# Altium PCB PCB_BTL_2.PcbDoc
Units mm, origin at the board's own origin, x right, y up, seen from the top; angles counter-clockwise.
Board outline 124.59 x 101.6 mm, 2 copper layers (Top Layer, Bottom Layer); 41 components, 38 nets, 137 pads, 5 vias.
Unrouted connection lines stored in the file: 3.
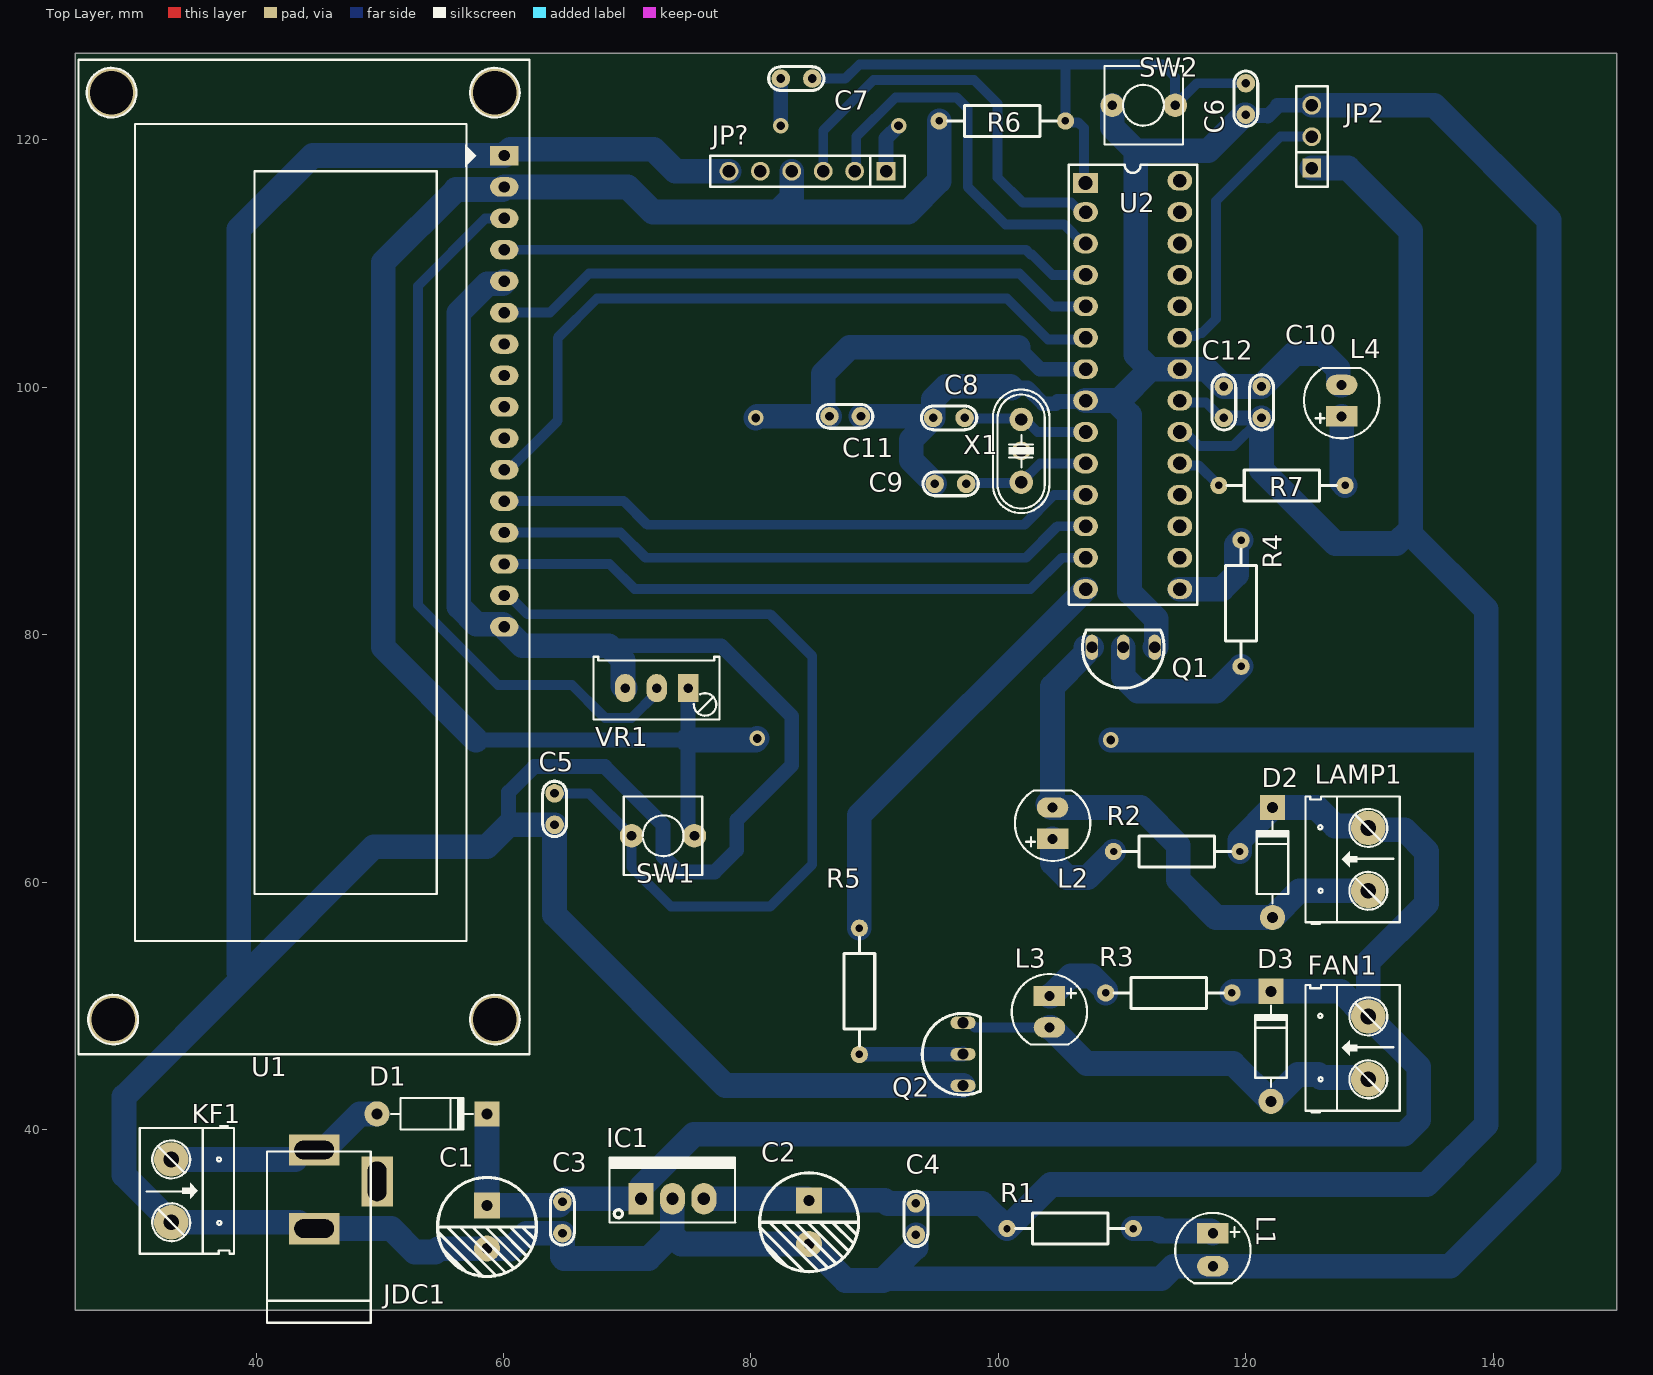
[diagram p0: Top Layer view]
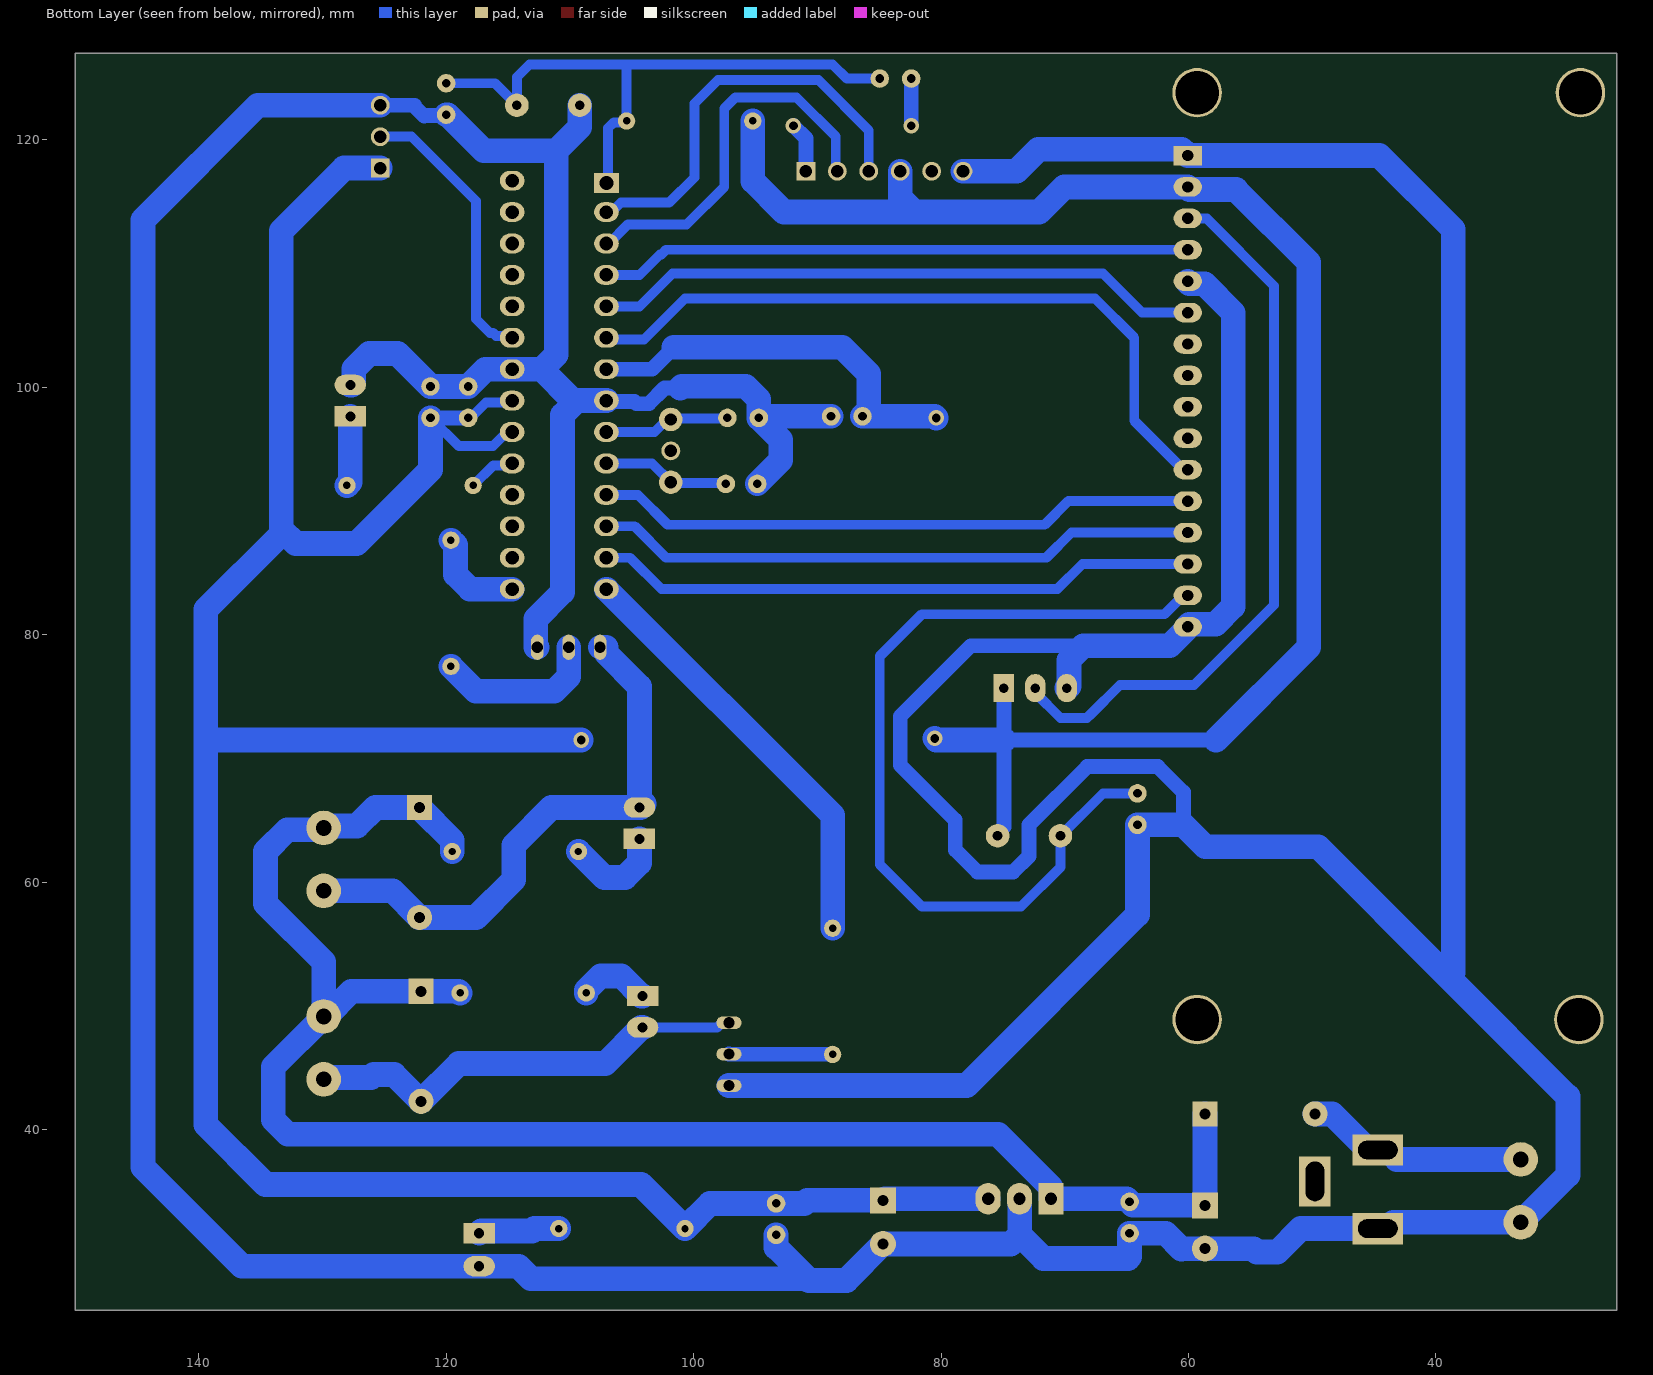
[diagram p1: Bottom Layer view, seen from below]
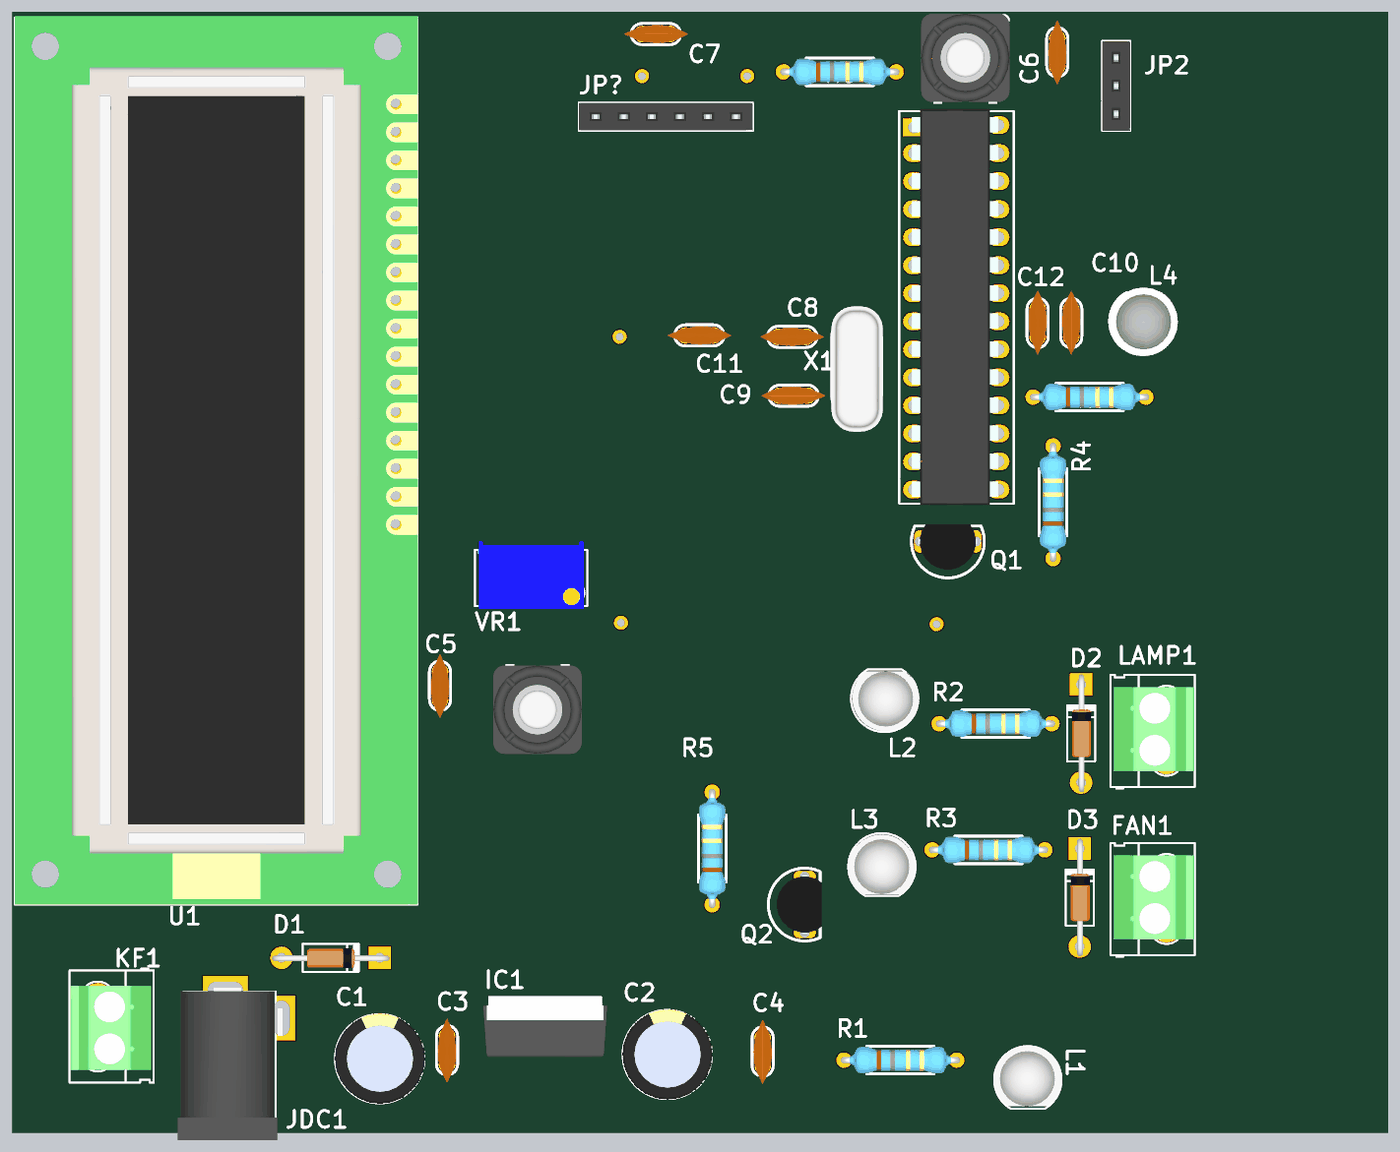
[diagram p2: 3D render of the assembled board from above, using the file's embedded part models]

## Layer stack, top to bottom
Top Solder: solder mask 0.0102, Solder Resist, Dk 3.5
Top Layer: signal copper 0.0356
Dielectric 1: dielectric 0.32, FR-4, Dk 4.8
Bottom Layer: signal copper 0.0356
Bottom Solder: solder mask 0.0102, Solder Resist, Dk 3.5

## Board outline
25.4,25.4 149.987,25.4 149.987,127 25.4,127

## Design rules (kind name [scope] priority, off if disabled: settings)
Clearance [All] p1: gap=0.254 ignorepadtopadclearanceinfootprint=FALSE
PolygonConnect [All] p1: connectstyle=Relief reliefconductorwidth=0.254 reliefentries=4 polygonreliefangle="90 Angle" airgapwidth=0.254
RoutingVias [All] p1: holewidth=0.711 width=0.889 viastyle="Through Hole" minholewidth=0.711 minwidth=0.889 maxholewidth=0.711 maxwidth=0.889
SolderMaskExpansion [All] p1: expansion=0.102 istentingtop=FALSE
Width AREF [All] p1: maxlimit=2 minlimit=0.8 preferedwidth=1.2
Width gnd [All] p2: maxlimit=2 minlimit=0.8 preferedwidth=1.2
Width 9V [All] p3: maxlimit=2 minlimit=0.8 preferedwidth=1.2
Width [All] p4: maxlimit=0.8 minlimit=0.4 preferedwidth=0.5
30 further rules are at their usual default settings.

## Components (designator, comment, footprint, x,y, rotation, side; value= is the part's Value field where it differs from the comment)
C1 "1000uF" "tu hoa 8mm" 58.674,32.131 r270 top
C2 "1000uF" "tu hoa 8mm" 84.709,32.512 r270 top
C3 "104" "tu gom" 64.77,32.893 r270 top
C4 "104" "tu gom" 93.345,32.766 r270 top
C5 "104" "tu gom" 64.135,65.913 r270 top
C6 "104" "tu gom" 120.015,123.317 r270 top
C7 "104" "tu gom" 83.693,124.968 r0 top
C8 "22pF" "tu gom" 96.012,97.536 r180 top
C9 "22pF" "tu gom" 96.139,92.202 r180 top
C10 "104" "tu gom" 121.285,98.806 r90 top
C11 "104" "tu gom" 87.63,97.663 r0 top
C12 "104" "tu gom" 118.237,98.806 r90 top
D1 "1N4007" D1A 49.784,41.275 r180 top
D2 "1N4007" D1A 122.174,57.15 r270 top
D3 "1N4007" D1A 122.047,42.291 r270 top
FAN1 "DC MOTOR" "Con 2 KF301 5.08" 129.921,44.069 r90 top
IC1 "LM7805" QTO-220 71.12,34.417 r0 top
JDC1 "Jac DC" DC-IN 47.244,35.179 r90 top
JP2 "JP Sensor" "JP 1x3 CT" 125.349,117.729 r90 top
JP? "JP 1x6 2.54" "JP 1x6 CT" 90.932,117.475 r180 top
KF1 "CON 2 KF301" "Con 2 KF301 5.08" 33.147,37.592 r270 top
L1 "LED 5mm" LED-5MM-Green 117.348,31.496 r270 top
L2 "LED 5mm" LED-5MM-Yellow 104.394,63.5 r90 top
L3 "LED 5mm" LED-5MM-RED 104.14,50.8 r270 top
L4 "LED 5mm" LED-5MM-WHITE 127.762,98.933 r90 top
LAMP1 "DC LAMP" "Con 2 KF301 5.08" 129.921,59.309 r90 top
Q1 "?" TO92 110.109,78.994 r90 top value=C9014
Q2 "?" TO92 97.155,46.101 r0 top value=C9014
R1 "1k" "tro vach 1/4w" 105.811,32.004 r180 top
R2 "2k" "tro vach 1/4w" 114.427,62.484 r180 top
R3 "2k" "tro vach 1/4w" 113.792,51.054 r180 top
R4 "1k" "tro vach 1/4w" 119.634,82.55 r270 top
R5 "1k" "tro vach 1/4w" 88.773,51.181 r270 top
R6 "10k" "tro vach 1/4w" 100.33,121.539 r180 top
R7 "1k" "tro vach 1/4w" 122.936,92.075 r180 top
SW1 "SW" SW2 75.438,63.754 r180 top value="SW chip 2 pin"
SW2 "SW" SW2 109.22,122.809 r0 top value="SW chip 2 pin"
U1 "LCD" LCD16X2 60.071,118.745 r270 top value=LCD16x2
U2 "ATMEGA328P-PU" 27_DIP_7.62mm 107.051,116.523 r0 top
VR1 "10K" VR1 74.93,75.692 r180 top value="VR 10K"
X1 "16Mhz" XT2 101.854,94.869 r90 top value=4Mhz

## Footprints (in the part's own frame and the unit in brackets; to place one, negate y for a bottom-side part, rotate by r counter-clockwise, add the part's x,y. Pads: shape width x height; smd on the part's side, far side on the other; paste and mask are expansions set on the pad)
27_DIP_7.62mm [mm]
  rect 2x1.6 hole 1.1: 1(0,0)
  oval 2x1.6 hole 1.1: 2(0.01,-2.35) 3(0.01,-4.89) 4(0.01,-7.43) 5(0.01,-9.97) 6(0.01,-12.51) 7(0.01,-15.05) 8(0.01,-17.59) 9(0.01,-20.13) 10(0.01,-22.67) 11(0.01,-25.21) 12(0.01,-27.75) 13(0.01,-30.29) 14(0.01,-32.83) 15(7.63,-32.83) 16(7.63,-30.29) 17(7.63,-27.75) 18(7.63,-25.21) 19(7.63,-22.67) 20(7.63,-20.13) 21(7.63,-17.59) 22(7.63,-15.05) 23(7.63,-12.51) 24(7.63,-9.97) 25(7.63,-7.43) 26(7.63,-4.89) 27(7.63,-2.35) 28(7.63,0.19)
  silkscreen extent -1.35,-34.1 9.02,1.46, body extent -0.23,-34.26 7.65,1.68, height 4.65
"Con 2 KF301 5.08" [mil]
  round 110 hole 50: 1(0,0) 2(200,0)
  silkscreen extent -106,-100 300,200, body extent -45,-97 255,190, height 335
D1A [mil] "Diode 1A, W 100mil, L 350mil"
  round 80 hole 35: 1(0,0)
  rect 80x80 hole 35: 2(-350,0)
  silkscreen extent -305,-50 -45,50, body extent -386,-33 34,36, height 84
DC-IN [mm] "Jac DC input"
  rect 2.54x4.064 hole 1.5 slot 3.2 at 90 deg: 1(3.175,2.54) 2(-3.175,2.54)
  rect 4.064x2.54 hole 1.5 slot 3.2 at 0 deg: 3(0.635,-2.54)
  silkscreen extent -10.79,-2.03 3.05,6.35, body extent -10.42,-2.67 3.4,6.84, height 11.02
"JP 1x3 CT" [mm]
  rect 1.52x1.52 hole 1.02: 1(0,0)
  round 1.52 hole 1.02: 2(2.54,0) 3(5.08,0)
  silkscreen extent -1.52,-1.27 6.6,1.27, body extent -1.52,-1.25 6.6,1.25, height 8.51
"JP 1x6 CT" [mm] "6 row, straight, gold plating"
  rect 1.52x1.52 hole 1.02: 1(0,0)
  round 1.52 hole 1.02: 2(2.54,0) 3(5.08,0) 4(7.62,0) 5(10.16,0) 6(12.7,0)
  silkscreen extent -1.52,-1.27 14.22,1.27, body extent -1.52,-1.25 14.22,1.25, height 8.51
LCD16X2 [mil] "LCD dipslay 16x2, 16 pin"
  rect 62x90 hole 36: 1(0,0)
  oval 62x90 hole 36: 2(100,0) 3(200,0) 4(300,0) 5(400,0) 6(500,0) 7(600,0) 8(700,0) 9(800,0) 10(900,0) 11(1000,0) 12(1100,0) 13(1200,0) 14(1300,0) 15(1400,0) 16(1500,0)
  round 157.48 hole 137.8: "Hole 0"(-200,-30) "Hole 0"(-200,-1250) "Hole 0"(2750,-30) "Hole 0"(2750,-1245)
  silkscreen extent -305,-1355 2860,80, body extent -309,-1355 2860,82, height 414
LED-5MM-Green [mil] "LED 2 PIN, 5 ly , Only colour,pin to pin 100mil"
  rect 65x100 hole 32: 1(-5,0)
  oval 65x100 hole 32: 2(100,0)
  silkscreen extent -70,-120 154,120, body extent -69,-120 145,117, height 339
LED-5MM-RED [mil] "LED 2 PIN, 5 ly , Only colour,pin to pin 100mil"
  rect 65x100 hole 32: 1(0,0)
  oval 65x100 hole 32: 2(100,0)
  silkscreen extent -70,-120 154,120, body extent -65,-119 149,118, height 339
LED-5MM-WHITE [mil] "LED 2 PIN, 5 ly , Only colour, pin to pin 110mil"
  rect 65x100 hole 32: 1(-50,0)
  oval 65x100 hole 32: 2(50,0)
  silkscreen extent -120,-120 104,120, body extent -124,-125 121,120, height 340
LED-5MM-Yellow [mil] "LED 2 PIN, 5 ly , Only colour,pin to pin 100mil"
  rect 65x100 hole 32: 1(0,0)
  oval 65x100 hole 32: 2(100,0)
  silkscreen extent -70,-120 154,120, body extent -67,-122 147,115, height 339
QTO-220 [mil] "TO-220 - 1-2-3"
  rect 80x100 hole 39: 1(0,0)
  oval 80x100 hole 39: 2(100,0) 3(200,0)
  silkscreen extent -100,-76 300,130, body extent -121,-85 321,100, height 755
SW2 [mil] "SW button 2pin, 250x 250 mil"
  round 75 hole 31: 1(0,0) 2(200,0)
  silkscreen extent -25,-125 225,125, body extent -60,-163 255,157, height 257
TO92 [mil] "TO, Flat Index; 3 In-Line, Axial Leads; Body Dia. 4.8mm"
  oval 80x40 hole 35.43: 1(0,-100) 2(0,0) 3(0,100)
  silkscreen extent -130,-130 55,130, body extent -100,-109 61,109, height 343
"tro vach 1/4w" [mm]
  round 1.4 hole 0.6: 1(-5.1,0) 2(5.1,0)
  silkscreen extent -4.39,-1.25 4.42,1.25, body extent -5.38,-1.2 5.38,1.2, height 2.41
"tu gom" [mm] "Tu gom mini"
  round 1.5 hole 0.7: 1(-1.27,0) 2(1.27,0)
  silkscreen extent -2.25,-0.97 2.22,0.97, body extent -2.92,-0.85 2.92,0.85, height 6.12
"tu hoa 8mm" [mm]
  rect 2.1x2.1 hole 0.9: 1(-1.75,0)
  round 2.1 hole 0.9: 2(1.75,0)
  silkscreen extent -4,-4 4,4, body extent -4.1,-4.07 4.1,4.13, height 13.81
VR1 [mil] "Variable Resistor"
  rect 65x90 hole 30: 1(0,0)
  oval 65x90 hole 30: 2(100,0) 3(200,0)
  silkscreen extent -100,-100 301,100, body extent -88,-130 288,110, height 455
XT2 [mm] "Footpin for Crystal 2 pin"
  round 1.524 hole 1: 0(0,0)
  round 1.905 hole 1: 1(-2.54,0) 2(2.54,0)
  silkscreen extent -5.03,-2.29 4.96,2.29, body extent -5.93,-2.36 5.42,2.29, height 3.5

## Part data
C1 C2: library part "Tu Hoa 1000uF 16V 8x20", "Cắm", Chung_Loai=Cắm, Don_Vi=Con, Ma_Hang=MH008300, So_Chan=2, Ten_Linh_Kien="Tụ Hóa 1000uF 16V 8x20MM"
C3 C4 C7: library part "Tu gom 104 50V", "Cắm", Chung_Loai=Cắm, Don_Vi=Con, Ma_Hang=MH004761, So_Chan=2, Ten_Linh_Kien="Tụ gốm 104 100nF 50V"
C5 C6 C10 C11 C12: library part "Tu gom 101 50V", "Cắm", Chung_Loai=Cắm, Don_Vi=Con, Ma_Hang=MH004764, So_Chan=2, Ten_Linh_Kien="Tụ gốm 101 0.1nF 50V"
C8 C9: library part "Tu gom 22pF 50V", "Cắm", Chung_Loai=Cắm, Don_Vi=Con, Ma_Hang=MH004771, So_Chan=2, Ten_Linh_Kien="Tụ gốm 22P 50V"
D1 D2 D3: library part D1A, "Diode 1A"
FAN1 LAMP1: library part "CON 2 KF301", "Cắm", Chung_Loai=Cắm, Don_Vi=Con, Ma_Hang=MH000987, Ten_Linh_Kien="CON 2 KF301-2P 5.08MM Xanh Dương"
IC1: library part LM78xx, "On ap +, from + 5 to + 24VDC"
JDC1: library part DCIN, "Jac DC input"
JP2: library part "JP 1x3 2.54 Cai Thang", "Cắm", Chung_Loai=Cắm, Don_Vi=Con, Ma_Hang=MH004006, Ten_Linh_Kien="Jump Đơn Cái 2.54MM 1x20P Thẳng"
JP?: library part "JP 1x6 2.54 Cai Thang", "Cắm", Chung_Loai=Cắm, Don_Vi=Con, Ma_Hang=MH004006, Ten_Linh_Kien="Jump Đơn Cái 2.54MM 1x20P Thẳng"
KF1: "Cắm", Chung_Loai=Cắm, Don_Vi=Con, Ma_Hang=MH000987, Ten_Linh_Kien="CON 2 KF301-2P 5.08MM Xanh Dương"
L1: library part "LED 5mm Xanh La", "Cắm", Chung_Loai=Cắm, Don_Vi=Con, Ma_Hang=MH008969, Ten_Linh_Kien="LED 5MM Phủ Xanh (1000c)"
L2: library part "LED 5mm Vang", "Cắm", Chung_Loai=Cắm, Don_Vi=Con, Ma_Hang=MH008968, Ten_Linh_Kien="Led 5MM Phủ Vàng (1000c)"
L3: library part "LED 5mm Do", "Cắm", Chung_Loai=Cắm, Don_Vi=Con, Ma_Hang=MH008967, Ten_Linh_Kien="Led 5MM Phủ Đỏ (1000c)"
L4: library part "LED 5mm Trang", "Cắm", Chung_Loai=Cắm, Don_Vi=Con, Ma_Hang=MH008983, Ten_Linh_Kien="Led 5MM Trắng Đục (1000c)"
Q1 Q2: library part "Trans 2N3904", "NPN transistor EBC"
R1 R2 R3 R4 R5 R7: library part "Tro Vach 1/4W 5% 1k", "Cắm", Chung_Loai=Cắm, Don_Vi=Con, Ma_Hang=MH007390, So_Chan=2, Ten_Linh_Kien="Trở Vạch 1/4w 5% 1k"
R6: library part "Tro Vach 1/4W 5% 10k", "Căm", Chung_Loai=Cắm, Don_Vi=Con, Ma_Hang=MH007354, So_Chan=2, Ten_Linh_Kien="Trở Vạch 1/4w 5% 10K"
SW1 SW2: library part SW2, "Switch button 2 pin"
U2: "ATMEGA328P-PU; 8 bit Microcontroller AVR 20MHz 1; 32kb Flash; 2kb RAM; I2C SPI 2", Case/Package=PDIP, Frequency=20MHz, Manufacturer="Microchip / Atmel", Max Operating Temperature=85°C, Max Supply Voltage=5.5V, Min Operating Temperature=-40°C, Min Supply Voltage=1.8V, Package Quantity=14, Supplier Part Number 1=ATMEGA328P-PU-ND, Category=Microcontrollers, ComponentLink1Description=https://datasheet.ciiva.com/20168/73-4283-20168380.pdf?src-supplier=Rapid+Electronics, ComponentLink1URL=https://datasheet.ciiva.com/20168/73-4283-20168380.pdf?src-supplier=Rapid+Electronics, ComponentLink2Description=https://datasheet.ciiva.com/19457/2139111-19457070.pdf?src-supplier=Jameco, ComponentLink2URL=https://datasheet.ciiva.com/19457/2139111-19457070.pdf?src-supplier=Jameco, ComponentLink3Description=https://datasheet.ciiva.com/1157/1684409-1157696.pdf?src-supplier=Element14, ComponentLink3URL=https://datasheet.ciiva.com/1157/1684409-1157696.pdf?src-supplier=Element14, ComponentLink4Description=https://datasheet.ciiva.com/26818/atmega328p-pu-26818578.pdf?src-supplier=IIIC, ComponentLink4URL=https://datasheet.ciiva.com/26818/atmega328p-pu-26818578.pdf?src-supplier=IIIC, ComponentLink5Description=https://datasheet.ciiva.com/29119/155197-da-01-en-microcontr-atmega328p-pu-8bit-pdip-28-29119593.pdf?src-supplier=Conrad, ComponentLink5URL=https://datasheet.ciiva.com/29119/155197-da-01-en-microcontr-atmega328p-pu-8bit-pdip-28-29119593.pdf?src-supplier=Conrad, ComponentLink6Description=https://datasheet.ciiva.com/15213/getdatasheetpartid-318533-15213133.pdf?src-supplier=Verical, ComponentLink6URL=https://datasheet.ciiva.com/15213/getdatasheetpartid-318533-15213133.pdf?src-supplier=Verical, Contact Plating=Tin,Matte, Core Architecture=AVR, Data Bus Width=8b, Height=3.28mm, Interface=I2C,SPI,UART,USART,2-Wire, Lead Free="Lead Free", Length=37.4mm, Manufacturer Part Number=ATMEGA328P-PU, Max Frequency=20MHz, Memory Size=32KB, Memory Type=FLASH, Mount="Through Hole", Number of ADC Channels=6, Number of I2C Channels=1, Number of I/Os=23, Number of Pins=28, Number of Programmable I/O=23, Number of PWM Channels=6, Number of SPI Channels=1, Number of Timers/Counters=3, Oscillator Type=Internal, Packaging=Rail/Tube, Peripherals="Brown-out Detect/Reset,POR,PWM,WDT", Pricing 1="1=2,08000, 25=1,91000, 100=1,73000 (USD)", Radiation Hardening=No, RAM Size=2KB, REACH SVHC="No SVHC", RoHS=Yes, Stock 1=5280, Supplier 1=Digi-Key, Watchdog Timer=Yes, Width=6.76mm
VR1: library part VR1, "Var Resistor"
X1: library part XT2, "Crystal For all Crystal 2pin."

## Via types
v1: diameter 1.27, hole 0.711, Top Layer to Bottom Layer, 5 vias

## Nets (pads, with @x,y where several pads share a name; then routed paths per layer and width w, separated by ;. In a path a pad name is that pad's centre, name@x,y a point inside that pad or via, vN(x,y) a via of type N, cw(c..) or ccw(c..) an arc to the next point about the centre after c; other vN are vias at no path point)
+9: C1.1 C3.1 D1.2 D2.2 D3.2 FAN1.2 IC1.1 LAMP1.2 R2.1 R3.1 | length 141.9
  Bottom Layer w2: D1.2 C1.1 64.488,33.881 C3.1 65.024,34.417 IC1.1 71.136,34.433 71.136,35.357 75.403,39.624 132.813,39.624 133.985,40.796 133.985,45.085 FAN1.2 ; R3.1 119.019,51.181 D3.2 127.674,51.181 129.706,49.149 FAN1.2 ; R2.1 119.527,63.393 D2.2 125.73,66.04 127.229,64.541 129.769,64.541 LAMP1.2 130.073,64.237 132.867,64.237 134.62,62.484 134.62,58.273 129.921,53.574 FAN1.2
AREF: C2.1 C4.1 C10.1 C11.1 C12.1 IC1.3 JP2.1 JP?.4 R1.2 R6.2 SW1.1 U1.2 U2.7 U2.20 U2.21 VR1.1 | length 384.6
  Bottom Layer w0.8: U2.20 115.097,96.393 116.24,95.25 118.999,95.25 C10.1 ; U2.21 114.834,98.78 116.804,98.78 118.048,97.536 C12.1
  Bottom Layer w1.2: 57.785,71.501 74.93,71.501 ; VR1.1 74.93,71.501 ; SW1.1 75.438,63.945 74.93,64.453 74.93,71.501 ; 101.6,103.251 103.378,101.473 U2.7 ; C12.1 C10.1
  Bottom Layer w2: 57.785,71.501 50.292,78.994 50.292,110.109 56.175,115.992 59.928,115.992 60.071,116.135 U1.2 70.055,116.205 72.087,114.173 82.14,114.173 ; 74.93,71.501 80.391,71.501 v1(80.518,71.628) ; IC1.3 84.554,34.417 C2.1 84.737,34.29 90.805,34.29 91.059,34.036 C4.1 98.679,34.036 R1.2 104.267,35.56 134.62,35.56 139.446,40.386 139.446,71.628 ; v1(80.391,97.536) 80.518,97.663 C11.1 85.852,98.171 85.852,101.092 88.011,103.251 101.6,103.251 ; JP?.4 83.312,115.345 82.14,114.173 ; R6.2 95.23,116.693 92.71,114.173 82.14,114.173 ; v1(109.093,71.501) 139.319,71.501 139.446,71.628 ; C10.1 121.285,93.345 127.254,87.376 132.178,87.376 133.35,88.548 ; JP2.1 128.27,117.729 133.35,112.649 133.35,88.548 ; 133.35,88.548 133.35,88.138 139.446,82.042 139.446,71.628
DTR: C7.1 JP?.1 | length 7.9
  Bottom Layer w1.2: v1(82.423,121.158) C7.1 ; JP?.1 90.932,120.142 v1(91.948,121.158)
Gnd: C1.2 C2.2 C3.2 C4.2 C5.2 C6.2 C8.2 C9.2 C10.2 C11.2 C12.2 IC1.2 JDC1.2 JP2.3 JP?.6 KF1.2 L1.2 L4.2 Q1.1 Q2.1 SW2.1 U1.1 U1.5 U1.16 U2.8 U2.22 VR1.3 | length 650
  Bottom Layer w0.8: L4.2@127.698,100.139 L4.2
  Bottom Layer w1.2: 60.423,64.643 60.423,67.281 62.484,69.342 68.199,69.342 72.898,64.643 72.898,62.103 74.168,60.833 77.089,60.833 78.867,62.611 78.867,65.024 83.312,69.469 83.312,73.406 77.597,79.121 68.504,79.121 ; 101.092,99.949 102.362,99.949 103.632,98.679 104.626,98.679 104.804,98.856 106.984,98.856 U2.8 ; C6.2 120.072,121.99 121.723,121.99 121.793,121.92 122.555,122.682 122.555,122.809 JP2.3
  Bottom Layer w2: U1.5 60.071,108.515 59.928,108.372 58.715,108.372 56.388,106.045 56.388,82.296 57.826,80.858 59.928,80.858 60.071,80.715 U1.16 60.071,80.575 61.525,79.121 68.504,79.121 69.675,77.949 69.675,75.835 69.818,75.692 VR1.3 ; IC1.2 73.654,34.411 73.654,31.49 ; JP?.6 73.914,117.475 72.136,119.253 60.579,119.253 60.284,118.958 60.214,118.958 60.071,118.815 U1.1 44.577,118.745 38.608,112.776 38.608,52.705 38.989,52.324 ; C11.2 94.615,97.663 C8.2 ; C4.2 93.345,30.48 90.805,27.94 ; C9.2 92.967,94.104 92.967,95.761 C8.2 ; Q2.1 77.949,43.561 64.135,57.375 C5.2 60.423,64.643 58.645,62.865 49.53,62.865 38.989,52.324 ; 101.092,99.949 100.952,100.089 95.799,100.089 94.742,99.031 C8.2 ; U2.8 109.445,98.933 ; SW2.1 109.22,121.031 111.125,119.126 ; Q1.1 112.76,78.994 112.776,79.01 112.776,81.28 110.617,83.439 110.617,97.761 109.445,98.933 ; C6.2 119.888,122.047 116.967,119.126 111.125,119.126 ; JP2.3 135.255,122.809 144.526,113.538 144.526,36.957 136.525,28.956 L1.2 114.173,28.956 113.157,27.94 90.805,27.94 ; L4.2 127.667,100.203 127.492,100.378 127.492,101.489 126.238,102.743 123.952,102.743 C10.2 C12.2 116.84,101.473 U2.22 112.297,101.473 ; 38.989,52.324 29.337,42.672 29.337,36.322 KF1.2 43.434,32.512 43.942,32.004 JDC1.2 50.927,32.004 52.832,30.099 54.489,30.099 54.752,30.362 58.655,30.362 C1.2 58.693,30.362 60.57,30.362 60.579,30.353 61.849,31.623 C3.2 64.77,29.718 64.897,29.591 71.755,29.591 73.654,31.49 ; 73.654,31.49 74.382,30.762 C2.2 87.658,27.813 90.678,27.813 90.805,27.94 ; 109.445,98.933 109.757,98.933 112.297,101.473 ; 111.125,119.126 111.125,102.645 112.297,101.473
NetC5_1: C5.1 SW1.2 U1.15 | length 71.3
  Bottom Layer w0.8: U1.15 60.427,83.185 61.951,81.661 81.573,81.661 84.963,78.271 84.963,61.429 81.573,58.039 73.533,58.039 70.358,61.214 SW1.2 66.929,67.183 C5.1
NetC6_1: C6.1 C7.2 R6.1 SW2.2 U2.1 | length 50
  Bottom Layer w0.8: C7.2 87.63,124.968 88.773,126.111 105.41,126.111 ; U2.1@106.851,116.523 U2.1 106.934,116.64 106.934,120.956 106.465,121.424 105.545,121.424 R6.1 105.43,126.091 105.41,126.111 ; C6.1 116.078,124.587 SW2.2 114.3,125.095 113.284,126.111 105.41,126.111
NetD1_1: D1.1 JDC1.1 KF1.1 | length 18.2
  Bottom Layer w2: KF1.1 43.18,37.592 43.942,38.354 JDC1.1 45.466,38.354 48.381,41.269 49.778,41.269 D1.1
NetD2_1: D2.1 L2.2 LAMP1.1 Q1.3 | length 46.7
  Bottom Layer w2: L2.2@104.013,66.326 L2.2@104.299,66.04 ; Q1.3 107.093,78.994 107.077,78.978 107.077,78.502 104.394,75.819 L2.2 111.506,66.04 114.554,62.992 114.554,60.198 117.602,57.15 D2.1 122.183,57.15 124.342,59.309 LAMP1.1
NetD3_1: D3.1 FAN1.1 L3.2 Q2.3 | length 36.4
  Bottom Layer w0.8: Q2.3 97.721,48.641 98.102,48.26 L3.2
  Bottom Layer w2: L3.2 104.235,48.26 107.156,45.339 118.999,45.339 D3.1 122.056,42.291 124.215,44.45 125.872,44.45 126.101,44.221 129.769,44.221 FAN1.1
NetL1_1: L1.1 R1.1 | length 6.6
  Bottom Layer w2: R1.1 112.871,32.004 113.078,31.798 117.173,31.798 L1.1
NetL2_1: L2.1 R2.2 | length 8.2
  Bottom Layer w2: L2.1 104.394,61.551 105.566,60.379 107.222,60.379 R2.2
NetL3_1: L3.1 R3.2 | length 5.9
  Bottom Layer w2: L3.1 104.235,50.8 105.864,52.428 107.52,52.428 108.692,51.256 R3.2
NetL4_1: L4.1 R7.1 | length 5.7
  Bottom Layer w2: L4.1 127.762,92.349 R7.1
NetQ1_2: Q1.2 R4.2 | length 13.2
  Bottom Layer w2: Q1.2 110.109,76.61 111.281,75.438 117.622,75.438 R4.2
NetQ2_2: Q2.2 R5.2 | length 8.4
  Bottom Layer w1.2: R5.2 88.783,46.091 97.145,46.091 Q2.2
NetU1_3: U1.3 VR1.2 | length 59.3
  Bottom Layer w0.8: U1.3 60.05,113.644 58.526,113.644 53.086,108.204 53.086,82.423 59.563,75.946 65.532,75.946 67.945,73.533 68.199,73.279 70.358,73.279 72.39,75.311 VR1.2
PB0: R5.1 U2.14 | length 35.2
  Bottom Layer w0.8: U2.14@106.861,83.693 U2.14
  Bottom Layer w2: R5.1 88.773,65.405 U2.14
PB1: R4.1 U2.15 | length 8.2
  Bottom Layer w0.8: R4.1@119.472,87.65 R4.1
  Bottom Layer w2: U2.15 118.081,83.693 119.253,84.865 119.253,87.269 R4.1
PB2: U2.16
PB3: U2.17
PB4: U2.18
PB5: R7.2 U2.19 | length 3.9
  Bottom Layer w0.8: U2.19 114.834,93.7 116.211,93.7 R7.2
PC0: JP2.2 U2.23 | length 23
  Bottom Layer w0.8: U2.23 114.834,104.166 115.977,104.166 116.205,104.394 116.459,104.394 117.602,105.537 117.602,115.062 122.809,120.269 JP2.2
PC1: U2.24
PC2: U2.25
PC3: U2.26
PC4: U2.27
PC5: U2.28
PD2: U1.4 U2.4 | length 47.8
  Bottom Layer w0.8: U1.4 102.235,111.125 102.616,110.744 102.743,110.744 104.394,109.093 U2.4
PD3: U1.6 U2.5 | length 49.4
  Bottom Layer w0.8: U1.6 63.754,106.045 66.929,109.22 101.727,109.22 104.394,106.553 U2.5
PD4: U1.11 U2.6 | length 58.1
  Bottom Layer w0.8: U1.11 60.427,93.345 64.389,97.307 64.389,104.013 67.564,107.188 100.711,107.188 104.013,103.886 106.934,103.886 U2.6
PD5: U1.12 U2.11 | length 48.8
  Bottom Layer w0.8: U1.12 69.723,90.805 71.628,88.9 102.108,88.9 104.521,91.313 U2.11
PD6: U1.13 U2.12 | length 48.9
  Bottom Layer w0.8: U1.13 69.469,88.265 71.501,86.233 102.235,86.233 104.775,88.773 U2.12
PD7: U1.14 U2.13 | length 48.9
  Bottom Layer w0.8: U1.14 68.58,85.725 70.612,83.693 102.616,83.693 105.156,86.233 U2.13
RX: JP?.2 U2.3 | length 31.3
  Bottom Layer w0.8: JP?.2 88.519,117.602 88.519,120.269 91.694,123.444 96.647,123.444 97.536,122.555 97.536,116.205 100.584,113.157 105.337,113.157 106.861,111.633 U2.3
TX: JP?.3 U2.2 | length 34.1
  Bottom Layer w0.8: JP?.3 85.852,120.777 89.916,124.841 98.044,124.841 99.949,122.936 99.949,116.967 101.981,114.935 105.883,114.935 106.645,114.173 U2.2
XTAL1: C8.1 U2.9 X1.2 | length 10.3
  Bottom Layer w0.8: C8.1 97.346,97.472 101.79,97.472 X1.2 102.153,97.409 103.169,96.393 U2.9
XTAL2: C9.1 U2.10 X1.1 | length 10.3
  Bottom Layer w0.8: C9.1 97.472,92.266 101.79,92.266 X1.1 103.378,93.853 U2.10
pads on no net: "U1.Hole 0" JDC1.3 JP?.5 U1.7 U1.8 U1.9 U1.10 X1.0

## Dimensions
149.987,127 to 149.987,25.4 on Bottom Layer
149.987,127 to 25.4,127 on Bottom Layer